# EAGLE board PineWoodDerby-Mega_Shield (EAGLE 7.2.0)
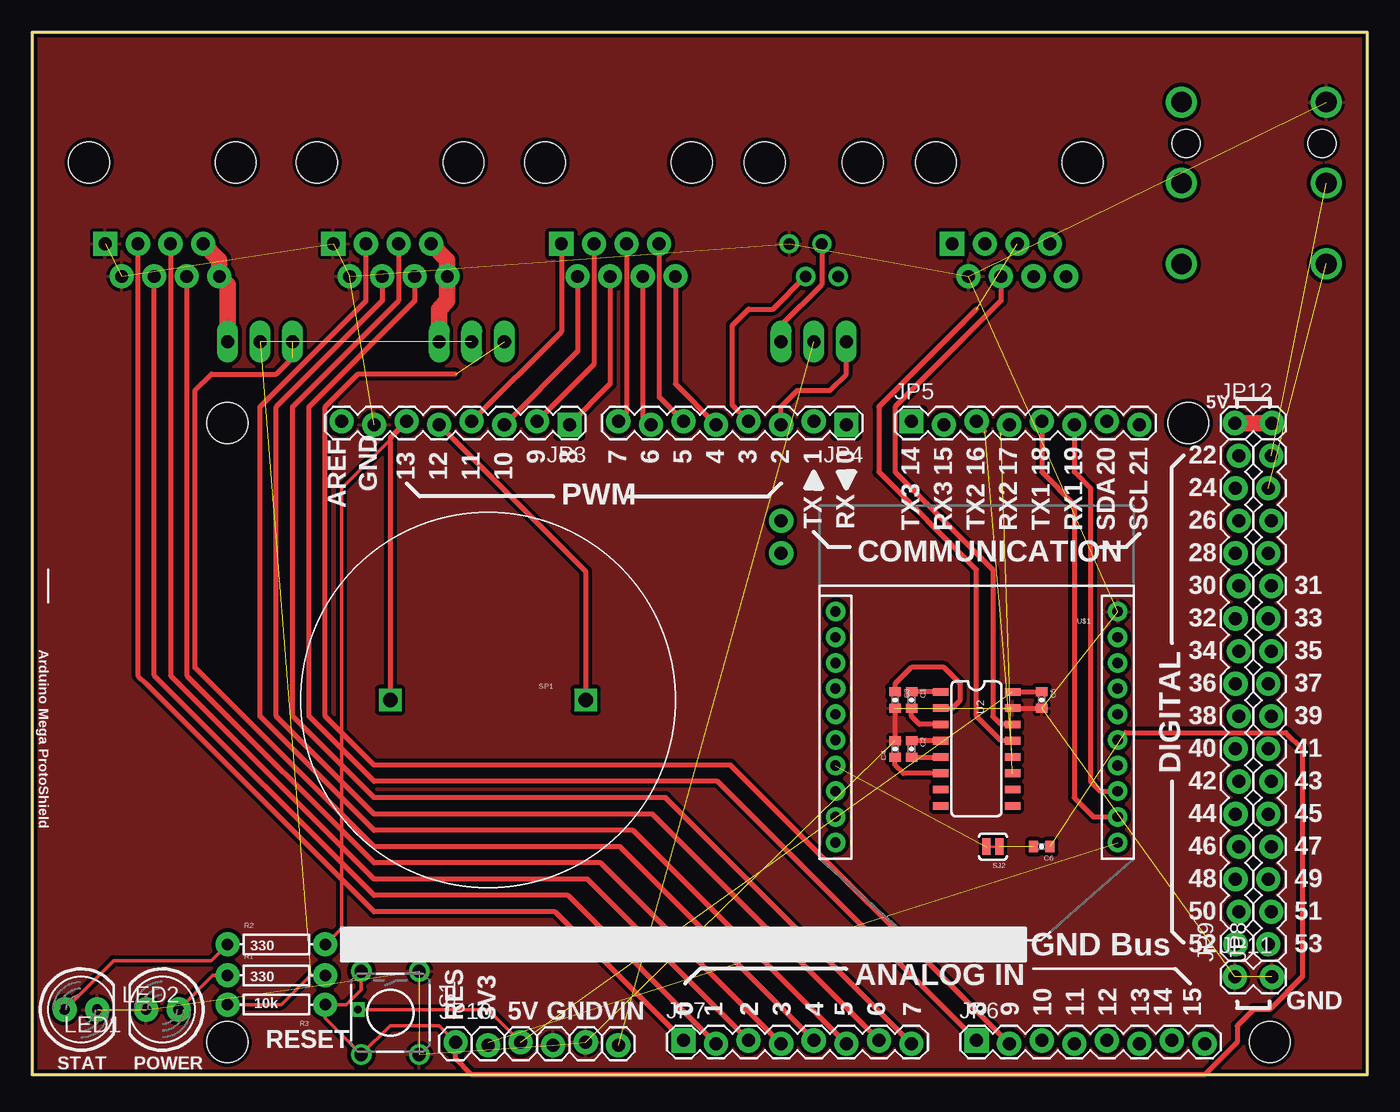
[diagram p0: board, top side]
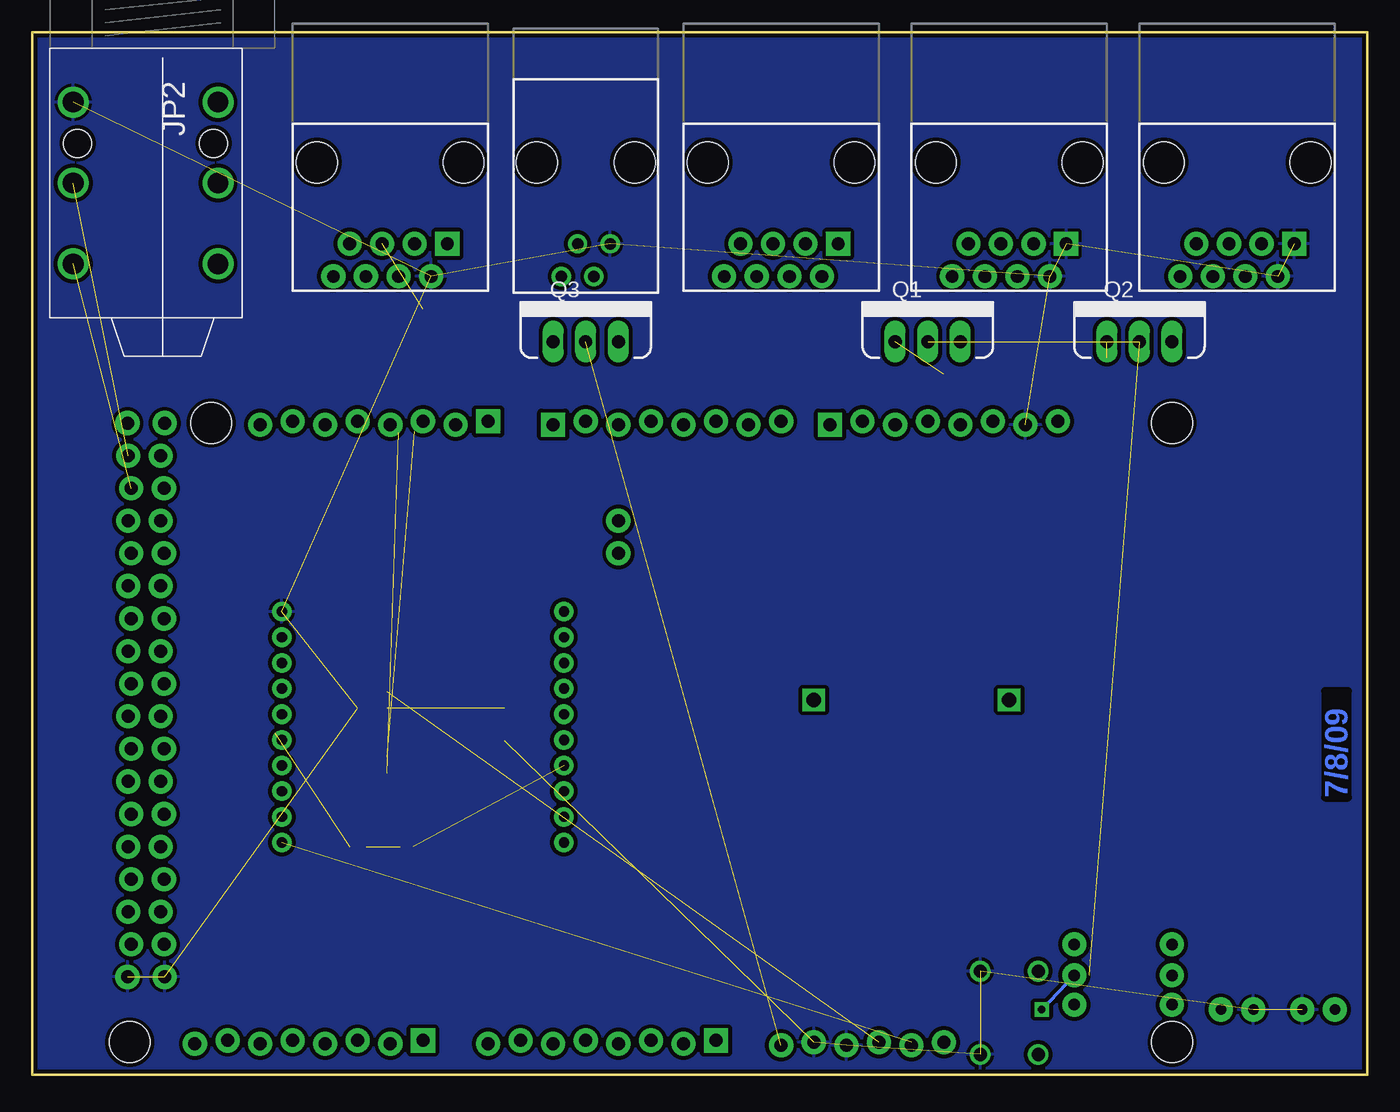
[diagram p1: board, bottom side, seen from below]

Size 104.14 x 81.28 mm. Coordinates in mm from the lower left corner, seen from the top.
Outline: 0,0 104.14,0 104.14,81.28 0,81.28 0,0
Copper layers (1*16): Top 0.035mm / dielectric 1.5mm / Bottom 0.035mm
Design rules "SparkFun": minimum track width 8mil, minimum drill 20mil, track to track 8mil, track to pad 8mil, pad to pad 8mil, via to via 8mil, smd to smd 8mil, copper to edge 10mil, drill to drill 8mil, minimum pad ring 12mil, minimum via ring 10mil, stop-mask expansion 4mil, vias tented up to drill 25mil, thermal gap 10mil
Net classes: 0 default: width 0.203 mm
Holes 3.2 mm at 15.24,50.8 15.24,2.54 90.17,50.8 96.52,2.54

## Footprints (pad centres in the part's own frame; a part is rotated, then mirrored left to right if it is on the bottom)
0402-CAP = smd 0.7 x 0.9: 1 -0.65,0; 2 0.65,0
RJ45-8 = drill 1 pad 1.88 square: 1 -4.445,6.35 | drill 1 pad 1.88: 2 -3.175,8.89; 3 -1.905,6.35; 4 -0.635,8.89; 5 0.635,6.35; 6 1.905,8.89; 7 3.175,6.35; 8 4.445,8.89 | hole 3.2: -5.715,0; 5.715,0
AUDIO-JACK-.25-INCH-HORIZ-PTH = drill 1.6: RING 10.5,-6.95; RING-NORM 10.5,4.35; SLEEVE 4.2,-6.95; SLEEVE-NORM 4.2,4.35; TIP 16.8,-6.95; TIP-NORM 16.8,4.35 | hole 2.2: 7.4,4; 7.4,-6.6
1X08_LOCK = drill 1.016 pad 1.88 square: 1 0,0.127 | drill 1.016 pad 1.88: 2 2.54,-0.127; 3 5.08,0.127; 4 7.62,-0.127; 5 10.16,0.127; 6 12.7,-0.127; 7 15.24,0.127; 8 17.78,-0.127
1X16_LOCK = drill 1.016 pad 1.88: 1 0,0.127; 2 2.54,-0.127; 3 5.08,0.127; 4 7.62,-0.127; 5 10.16,0.127; 6 12.7,-0.127; 7 15.24,0.127; 8 17.78,-0.127; 9 20.32,0.127; 10 22.86,-0.127; 11 25.4,0.127; 12 27.94,-0.127; 13 30.48,0.127; 14 33.02,-0.127; 15 35.56,0.127; 16 38.1,-0.127
1X06_LOCK = drill 1.016 pad 1.88: 1 0,0; 2 2.54,-0.254; 3 5.08,0; 4 7.62,-0.254; 5 10.16,0; 6 12.7,-0.254
1X02_LOCK = drill 1.016 pad 1.88: 1 -0.178,0; 2 2.718,0
LED5MM = drill 0.813 pad 1.88: A -1.27,0; K 1.27,0
TO220V = drill 1.016 long: 1 -2.54,0; 2 0,0; 3 2.54,0
AXIAL-0.3 = drill 0.9 pad 1.88: P$1 -3.81,0; P$2 3.81,0
TACTILE-PTH = drill 1.016: 1 -3.251,2.261; 2 3.251,2.261; 3 -3.251,-2.261; 4 3.251,-2.261
SJ_2S-TRACE = smd 0.635 x 1.27: 1 -0.508,0; 2 0.508,0
PCB_MOUNT_SPEAKER = drill 1.143 square: + -7.62,0; - 7.62,0
SO016 = smd 0.6 x 1.2: 1 -4.445,-2.8; 2 -3.175,-2.8; 3 -1.905,-2.8; 4 -0.635,-2.8; 5 0.635,-2.8; 6 1.905,-2.8; 7 3.175,-2.8; 8 4.445,-2.8; 9 4.445,2.8; 10 3.175,2.8; 11 1.905,2.8; 12 0.635,2.8; 13 -0.635,2.8; 14 -1.905,2.8; 15 -3.175,2.8; 16 -4.445,2.8
XBEE-SILK = drill 0.8 pad 1.524: 1 -11,20; 2 -11,18; 3 -11,16; 4 -11,14; 5 -11,12; 6 -11,10; 7 -11,8; 8 -11,6; 9 -11,4; 10 -11,2; 11 11,2; 12 11,4; 13 11,6; 14 11,8; 15 11,10; 16 11,12; 17 11,14; 18 11,16; 19 11,18; 20 11,20
RJ9 = drill 0.889: 1 -1.905,6.35; 2 -0.635,8.89; 3 0.635,6.35; 4 1.905,8.89 | hole 3.2: -3.81,0; 3.81,0

## Placement (x,y rotation side)
C1  .1uF  [0402-CAP]  68.58,29.21 270 top
C2  .1uF  [0402-CAP]  68.58,25.4 270 top
C3  .1uF  [0402-CAP]  67.31,29.21 270 top
C4  .1uF  [0402-CAP]  67.31,25.4 90 top
C5  .1uF  [0402-CAP]  78.74,29.21 270 top
C6  0.1uF  [0402-CAP]  78.74,17.78 180 top
CN1  RJ45-8PTH  [RJ45-8]  27.94,71.12 180 bottom
CN2  RJ45-8PTH  [RJ45-8]  10.16,71.12 180 bottom
CN3  RJ45-8PTH  [RJ45-8]  45.72,71.12 180 bottom
CN4  RJ45-8PTH  [RJ45-8]  76.2,71.12 180 bottom
FRAME2  FRAME-LEDGER  [CREATIVE_COMMONS]  17.78,-17.78 0 top  (outside the outline)
JP2  AUDIO-JACK4-.25-HORIZ-TRS  [AUDIO-JACK-.25-INCH-HORIZ-PTH]  93.98,80.01 270 bottom
JP3  [1X08_LOCK]  41.91,50.8 180 top
JP4  [1X08_LOCK]  63.5,50.8 180 top
JP5  [1X08_LOCK]  68.58,50.8 0 top
JP6  [1X08_LOCK]  73.66,2.54 0 top
JP7  [1X08_LOCK]  50.8,2.54 0 top
JP8  M16LOCK  [1X16_LOCK]  96.52,10.16 90 top
JP9  M16LOCK  [1X16_LOCK]  93.98,10.16 90 top
JP10  [1X06_LOCK]  33.02,2.54 0 top
JP11  [1X02_LOCK]  93.98,7.62 0 top
JP12  [1X02_LOCK]  93.98,50.8 0 top
LED1  Red  [LED5MM]  10.16,5.08 180 top
LED2  Green  [LED5MM]  3.81,5.08 0 top
Q1  MOSFET-PCHANNELFQP27P06  [TO220V]  34.29,57.15 0 bottom
Q2  MOSFET-PCHANNELFQP27P06  [TO220V]  17.78,57.15 0 bottom
Q3  MOSFET-PCHANNELFQP27P06  [TO220V]  60.96,57.15 0 bottom
R1  330  [AXIAL-0.3]  19.05,7.75 0 top
R2  330  [AXIAL-0.3]  19.05,10.16 0 top
R3  10k  [AXIAL-0.3]  19.05,5.46 180 top
S1  [TACTILE-PTH]  27.94,4.83 270 top
SJ2  SOLDERJUMPERTRACE  [SJ_2S-TRACE]  74.93,17.78 180 top
SP1  SPEAKERPCB_MOUNT  [PCB_MOUNT_SPEAKER]  35.56,29.21 180 top
U2  MAX3232  [SO016]  73.66,25.4 270 top
U$1  XBEE-2B2  [XBEE-SILK]  73.66,38.1 180 top
U$3  RJ9PTH  [RJ9]  60.96,71.12 180 bottom

## Library data of the parts
C1-C5 = SparkFun-Passives; PROD_ID: CAP-00810; SPARKLE_ID: 918
C6 JP3-JP12 LED1 LED2 R1-R3 S1 SJ2 = SparkFun
CN1 = SparkFun-Connectors; LABEL: Start Sensors
CN2 = SparkFun-Connectors; LABEL: End Sensors
CN3 = SparkFun-Connectors; LABEL: Start LEDs
CN4 = SparkFun-Connectors; LABEL: BetaBrite
FRAME2 = SparkFun-Aesthetics
JP2 = SparkFun-Connectors; PROD_ID: COM-11144
Q1-Q3 = SparkFun-DiscreteSemi
SP1 = SparkFun-Electromechanical; MFG: SANCO; PROD_#: NA; SKU: COM-11089; SPARKLE_ID: 6504
U2 = SparkFun-DigitalIC; PROD_ID: IC-08171
U$1 = SparkFun-RF
U$3 = SparkFun-Connectors; LABEL: Solenoid

## Nets
3.3: JP10.2 U$1.1
5V: C5.1 JP10.3 Q1.2 Q2.2 R1.P$2 R3.P$2 U2.16
5V@1: JP12.1 JP12.2
A10: JP6.3
A11: JP6.4
A12: JP6.5
A13: JP6.6
A14: JP6.7
A15: JP6.8
AREF: JP3.8
ARM_LED: JP2.RING JP8.16
BB_RX: CN4.5 U2.13
BB_TX: CN4.4 U2.14
C1+: C1.1 U2.1
C1-: C1.2 U2.3
C2+: C2.1 U2.4
C2-: C2.2 U2.5
D13: R2.P$2
D22: JP9.1
D24: JP9.2
D26: JP9.3
D27: JP8.14
D28: JP9.4
D29: JP8.13
D30: JP9.5
D31: JP8.12
D32: JP9.6
D33: JP8.11
D34: JP9.7
D35: JP8.10
D36: JP9.8
D37: JP8.9
D38: JP9.9
D39: JP8.8
D40: JP9.10
D41: JP8.7
D42: JP9.11
D43: JP8.6
D44: JP9.12
D45: JP8.5
D46: JP9.13
D47: JP8.4
D48: JP9.14
D49: JP8.3
D50: JP9.15
D51: JP8.2
D52: JP9.16
D53: JP8.1
DIO3: SJ2.2 U$1.17
EN_END_SNS: JP7.5 Q2.1
EN_SOL: JP4.3 Q3.1
EN_ST_SNS: JP6.2 Q1.1
END_SNS1: CN2.6 JP7.4
END_SNS2: CN2.5 JP7.3
END_SNS3: CN2.4 JP7.2
END_SNS4: CN2.3 JP7.1
GATE_SNS: JP4.4 U$3.2
GND: C3.2 C4.2 C5.2 CN1.1 CN1.2 CN2.1 CN2.2 CN4.2 JP2.SLEEVE JP3.7 JP10.4 JP10.5 JP11.1 JP11.2 LED1.K LED2.K S1.1 S1.2 U2.15 U$1.10 U$3.1
LED1+: CN3.1 JP3.4
LED1-: CN3.2 JP3.3
LED2+: CN3.3 JP3.2
LED2-: CN3.4 JP3.1
LED3+: CN3.5 JP4.8
LED3-: CN3.6 JP4.7
LED4+: CN3.7 JP4.6
LED4-: CN3.8 JP4.5
N$1: JP3.5 SP1.+
N$2: JP3.6 SP1.-
N$5: C6.2 SJ2.1
N$11: CN2.7 CN2.8 Q2.3
N$12: CN1.7 CN1.8 Q1.3
N$60: Q3.3 U$3.3
N$126: LED1.A R1.P$1
N$127: LED2.A R2.P$1
RES: C6.1 JP10.1 R3.P$1 S1.3 S1.4
RX0: JP4.1
RXD1: JP5.3 U2.12
RXD2: JP5.5 U$1.2
SCL: JP5.1
SDA: JP5.2
ST_SNS1: CN1.6 JP6.1
ST_SNS2: CN1.5 JP7.8
ST_SNS3: CN1.4 JP7.7
ST_SNS4: CN1.3 JP7.6
TRIGGER: JP2.TIP JP8.15
TX0: JP4.2
TXD1: JP5.4 U2.11
TXD2: JP5.6 U$1.3
V+: C3.1 U2.2
V-: C4.1 U2.6
VIN: JP10.6 Q3.2

## Tracks (layer width: path | path; a pad name or v marks a point on that pad's centre or on a via)
3.3  (1 unrouted)
  Top 0.203: JP10.2 35.56,2.54 JP10.2
5V  (via drill 0.6)  (3 unrouted)
  Top 0.254: v25.4,5.08 35.56,5.08 JP10.3 | R3.P$2 19.43,5.46 21.72,7.75 R1.P$2
  Top 0.406: U2.16 78.72,29.84 C5.1
  Bottom 0.254: R1.P$2 v25.4,5.08
5V@1
  Top 1.27: JP12.1 JP12.2
A10
  Top 0.203: JP6.3 78.74,2.54
A11
  Top 0.203: JP6.4 81.28,2.54 JP6.4
A12
  Top 0.203: JP6.5 83.82,2.54
A13
  Top 0.203: JP6.6 86.36,2.54 JP6.6
A14
  Top 0.203: JP6.7 88.9,2.54
A15
  Top 0.203: JP6.8 91.44,2.54 JP6.8
AREF
  Top 0.203: JP3.8 24.13,50.8 JP3.8
ARM_LED  (1 unrouted)
BB_RX  (1 unrouted)
  Top 0.406: 73.66,59.69 66.04,52.07 66.04,46.99 73.66,39.37 73.66,27.94 75.56,26.04 U2.13
BB_TX
  Top 0.406: CN4.4 75.56,60.33 67.31,52.07 67.31,46.99 74.93,39.37 74.93,27.94 75.56,27.3 U2.14
C1+
  Top 0.406: U2.1 68.59,29.84 C1.1
C1-
  Top 0.406: U2.3 69.22,27.3 68.58,27.94 C1.2
C2+
  Top 0.406: U2.4 68.59,26.04 C2.1
C2-
  Top 0.406: C2.2 70.84,24.75 U2.5
D13
  Top 0.254: R2.P$2 24.13,11.43 24.13,45.72 29.21,50.8
DIO3  (1 unrouted)
EN_END_SNS  (1 unrouted)
  Top 0.406: JP7.5 45.85,17.78 26.67,17.78 12.7,31.75 12.7,53.34 13.97,54.61 19.05,54.61 20.32,55.88
EN_SOL
  Top 0.406: JP4.3 58.42,52.07 59.69,53.34 62.23,53.34 63.5,54.61 Q3.1
EN_ST_SNS  (1 unrouted)
  Top 0.406: JP6.2 54.48,24.13 26.67,24.13 22.86,27.94 22.86,52.07 25.4,54.61 33.02,54.61
END_SNS1
  Top 0.406: JP7.4 44.32,16.51 26.67,16.51 12.7,30.48 12.06,31.11 CN2.6
END_SNS2
  Top 0.406: JP7.3 43.31,15.24 26.67,15.24 11.43,30.48 10.79,31.11 CN2.5
END_SNS3
  Top 0.406: JP7.2 41.78,13.97 26.67,13.97 9.53,31.11 CN2.4
END_SNS4
  Top 0.406: JP7.1 40.77,12.7 26.67,12.7 8.89,30.48 8.26,31.11 CN2.3
GATE_SNS
  Top 0.406: JP4.4 54.61,52.2 54.61,58.42 55.88,59.69 57.78,59.69 U$3.2
GND  (18 unrouted)
  Top 0.406: U2.15 78.72,28.57 C5.2 | C3.2 C4.2
  pour Bottom (isolate 0.305): 0,0 104.14,0 104.14,81.28 0,81.28
  pour Top (isolate 0.305): 0,0 104.14,0 104.14,81.28 0,81.28
LED1+
  Top 0.406: JP3.4 41.27,57.91 CN3.1
LED1-
  Top 0.406: JP3.3 42.55,56.39 CN3.2
LED2+
  Top 0.406: JP3.2 43.81,55.37 CN3.3
LED2-
  Top 0.406: JP3.1 45.09,53.85 CN3.4
LED3+
  Top 0.406: JP4.8 46.35,51.56 CN3.5
LED3-
  Top 0.406: JP4.7 47.62,51.31 CN3.6
LED4+
  Top 0.406: JP4.6 48.9,52.83 CN3.7
LED4-
  Top 0.406: JP4.5 50.16,53.85 CN3.8
N$1
  Top 0.406: JP3.5 43.18,39.24 SP1.+
N$2
  Top 0.406: JP3.6 27.94,49.66 SP1.-
N$5  (1 unrouted)
N$11
  Top 1.27: Q2.3 15.24,61.59 CN2.8 14.61,63.5 CN2.7
N$12
  Top 1.27: Q1.3 31.75,59.69 32.38,60.33 CN1.8 32.38,63.5 CN1.7
N$60
  Top 0.406: U$3.3 61.59,61.59 58.42,58.42 Q3.3
N$126
  Top 0.254: R1.P$1 14.1,7.75 LED1.A
N$127
  Top 0.254: R2.P$1 13.97,8.89 6.35,8.89 LED2.A
N$136  (via drill 1.02 pad 1.88)
  other vias: 58.42,43.18
N$137  (via drill 1.02 pad 1.88)
  other vias: 58.42,40.64
RES  (1 unrouted)
  Top 0.254: JP10.1 31.75,3.81 27.91,3.81 S1.4 22.86,4.39 R3.P$1 24.51,5.46 25.68,6.63 S1.3
  Top 0.406: 85.23,26.67 97.79,26.67 99.06,25.4 99.06,7.62 96.52,5.08 95.25,5.08 93.98,3.81 93.98,2.54 91.44,0 34.29,0 33.02,1.27 JP10.1
RX0
  Top 0.203: JP4.1 63.5,50.8
RXD1  (1 unrouted)
  Top 0.203: JP5.3 73.66,50.8
  Top 0.406: 73.66,50.8 74.3,50.16
RXD2
  Top 0.203: JP5.5 78.74,50.8
  Top 0.406: 78.74,50.8 78.74,46.99 81.28,44.45 81.28,21.59 82.77,20.1 U$1.2
SCL
  Top 0.203: JP5.1 68.58,50.8 JP5.1
SDA
  Top 0.203: JP5.2 71.12,50.8
ST_SNS1
  Top 0.406: JP6.1 53.47,22.86 26.67,22.86 21.59,27.94 21.59,52.07 29.84,60.33 CN1.6
ST_SNS2
  Top 0.406: JP7.8 49.4,21.59 26.67,21.59 20.32,27.94 20.32,52.07 28.57,60.33 CN1.5
ST_SNS3
  Top 0.406: JP7.7 48.39,20.32 26.67,20.32 19.05,27.94 19.05,52.07 27.3,60.33 CN1.4
ST_SNS4
  Top 0.406: JP7.6 46.86,19.05 26.67,19.05 17.78,27.94 17.78,52.07 26.04,60.33 CN1.3
TRIGGER  (1 unrouted)
TX0
  Top 0.203: JP4.2 60.96,50.8 JP4.2
TXD1  (1 unrouted)
  Top 0.203: JP5.4 76.2,50.8
  Top 0.406: JP5.4 75.56,50.04
TXD2
  Top 0.203: JP5.6 81.28,50.8
  Top 0.406: JP5.6 81.28,46.99 82.55,45.72 82.55,22.86 83.31,22.1 U$1.3
V+
  Top 0.406: 70.84,28.59 U2.2 71.75,28.57 72.39,29.21 72.39,30.48 71.12,31.75 68.58,31.75 67.31,30.48 C3.1
V-
  Top 0.406: U2.6 67.94,23.5 67.31,24.13 C4.1
VIN  (1 unrouted)

## Text on the board
Bottom: 7/8/09
tPlace: 5V | 9 | 8 | 7 | 6 | 5 | 4 | 3 | 2 | 1 | 0 | 22 | 14 | 15 | 16 | 17 | 18 | 19 | 20 | 21 | 13 | 12 | 11 | 10 | GND | 24 | AREF | PWM | TX | RX | 26 | TX3 | RX3 | TX2 | RX2 | TX1 | RX1 | SDA | SCL | COMMUNICATION | 28 | 30 | 31 | 32 | 33 | Arduino Mega ProtoShield | 34 | 35 | 36 | 37 | 38 | 39 | 40 | 41 | DIGITAL | 42 | 43 | 44 | 45 | 46 | 47 | 48 | 49 | 50 | 51 | 52 | 53 | GND Bus | ANALOG IN | 0 | 1 | 2 | 3 | 4 | 5 | 6 | 7 | 8 | 9 | 10 | 11 | 12 | 13 | 14 | 15 | GND | RES | 3V3 | 5V | GND | VIN | RESET | STAT | POWER